# Altium PCB DA1.PcbDoc
Units mil, origin at the board's own origin, x right, y up, seen from the top; angles counter-clockwise.
Board outline 3775.03 x 2530.03 mil, 2 copper layers (Top Layer, Bottom Layer); 64 components, 73 nets, 258 pads, 30 vias.
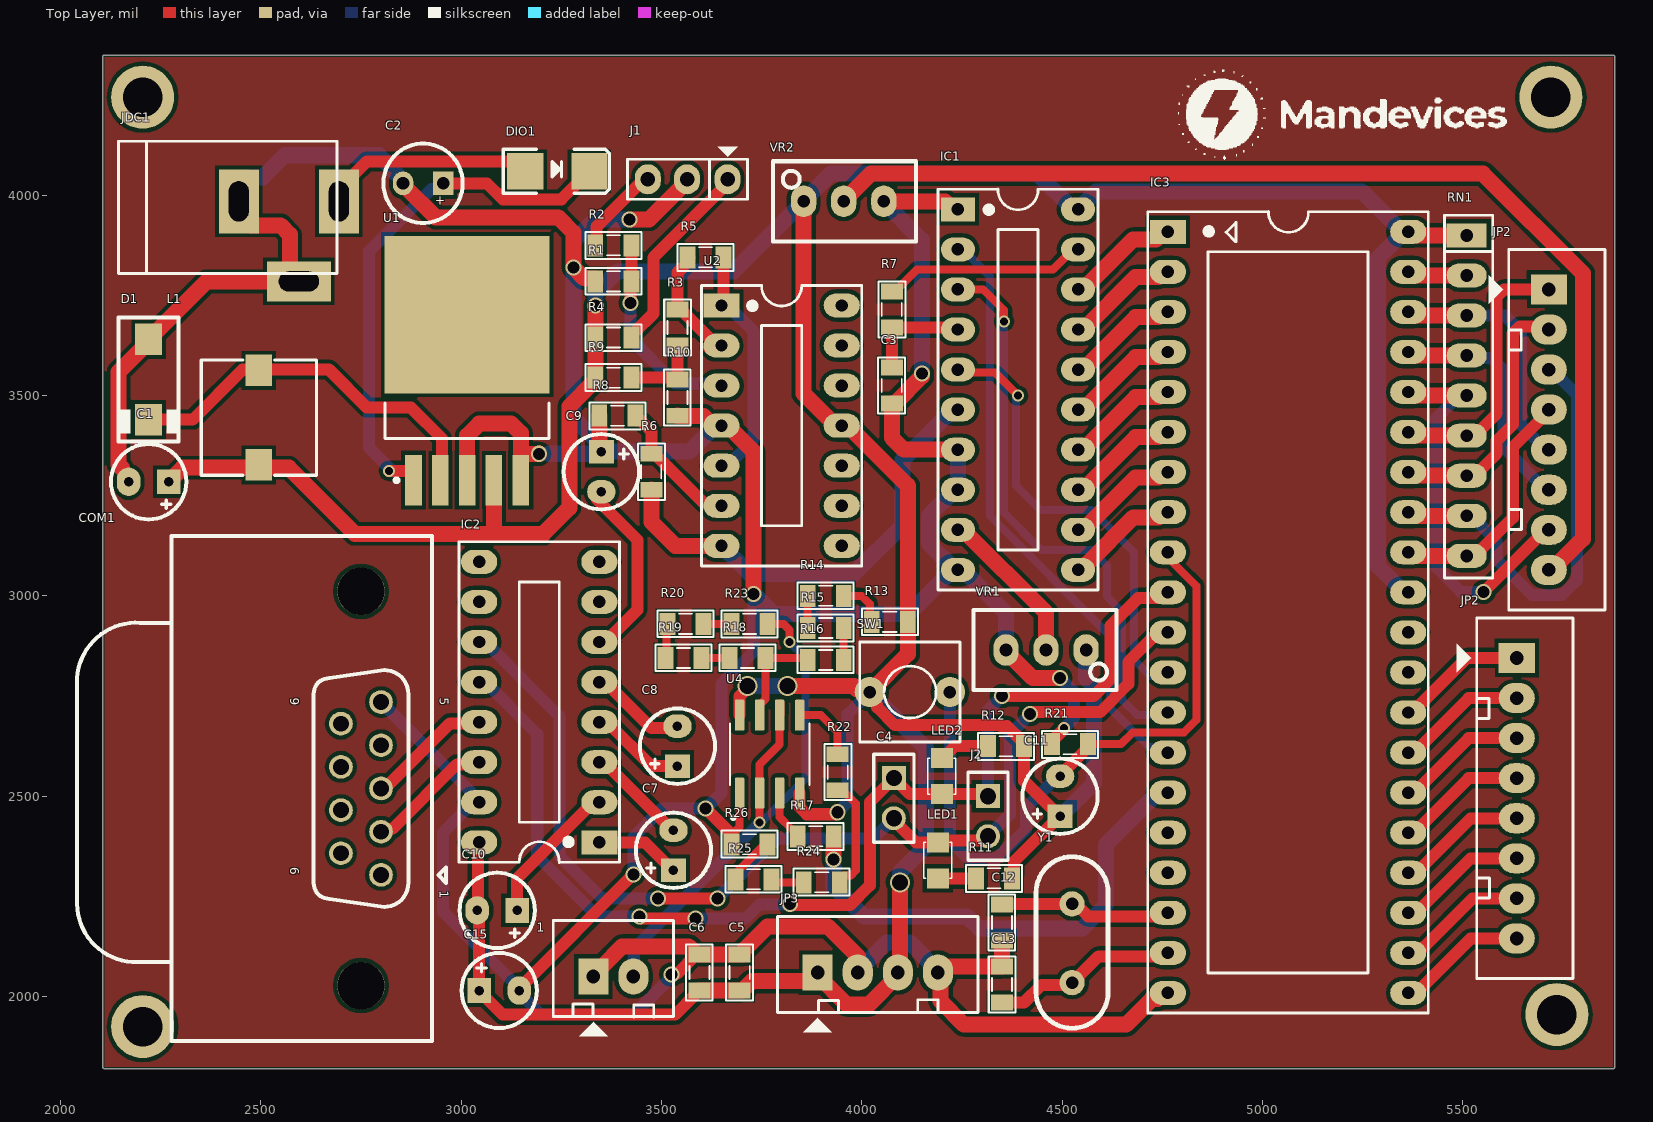
[diagram p0: Top Layer view]
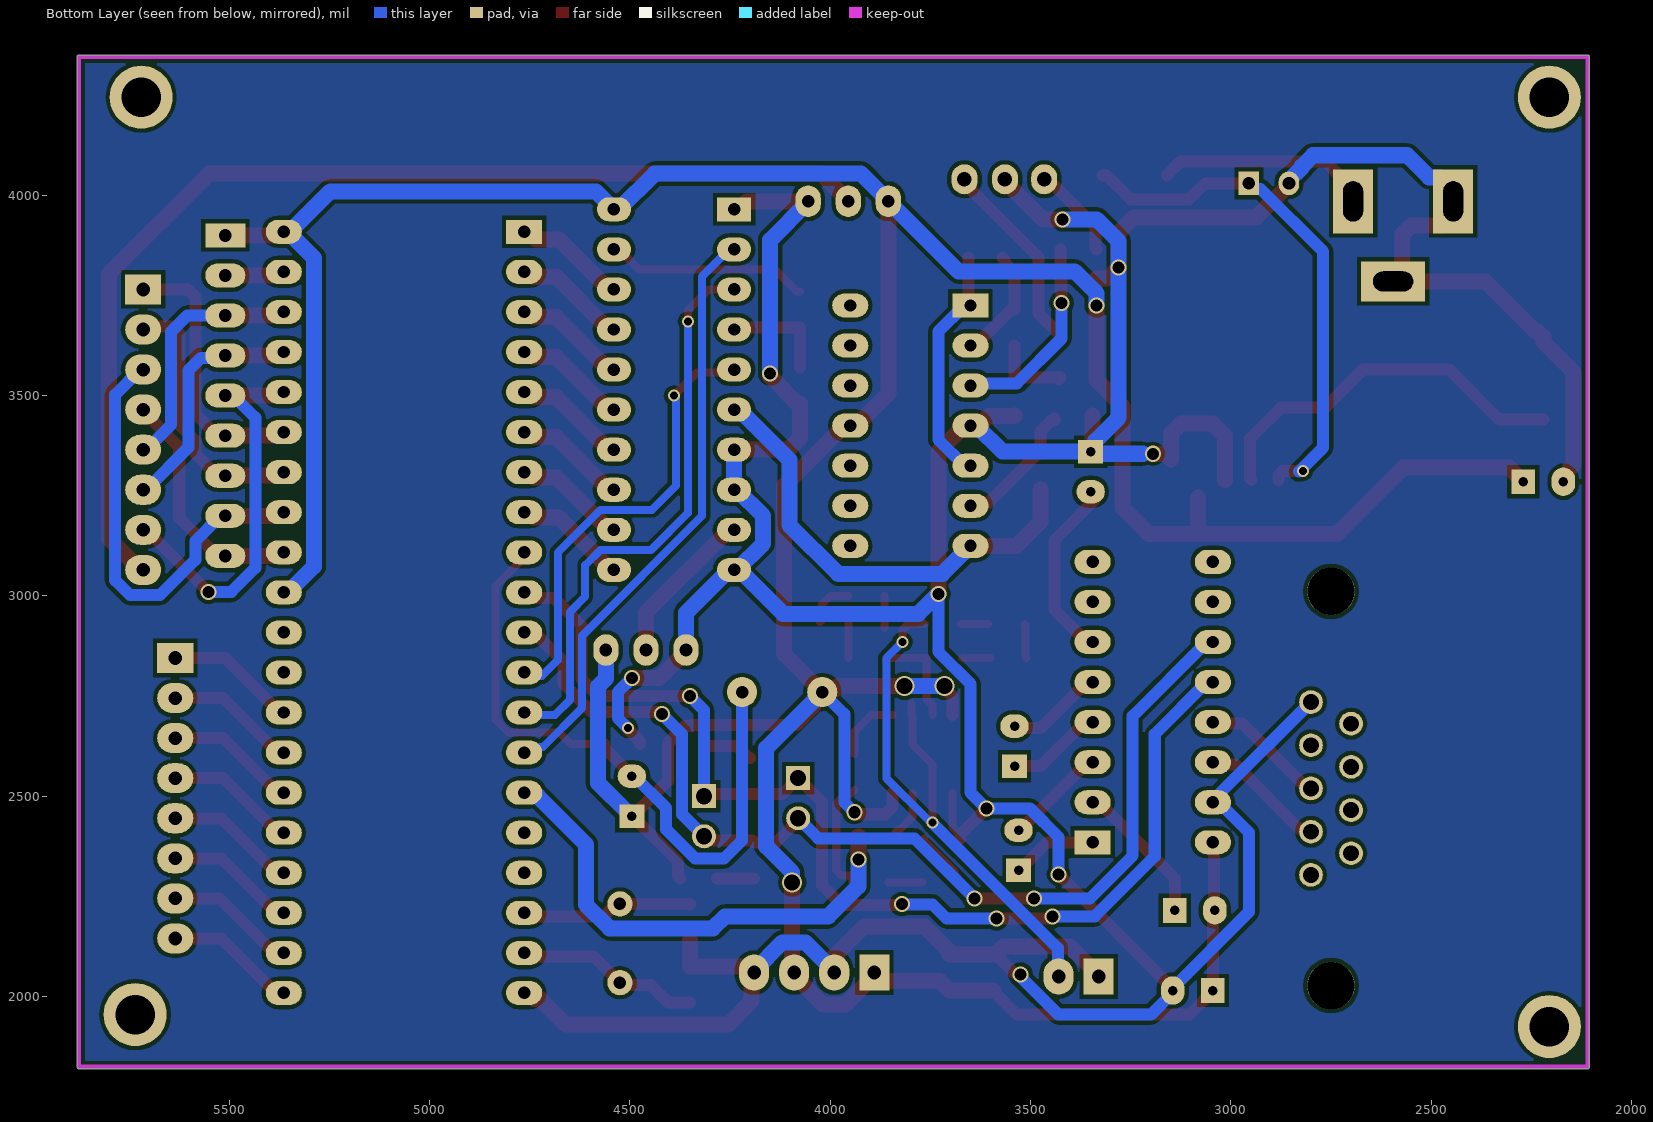
[diagram p1: Bottom Layer view, seen from below]
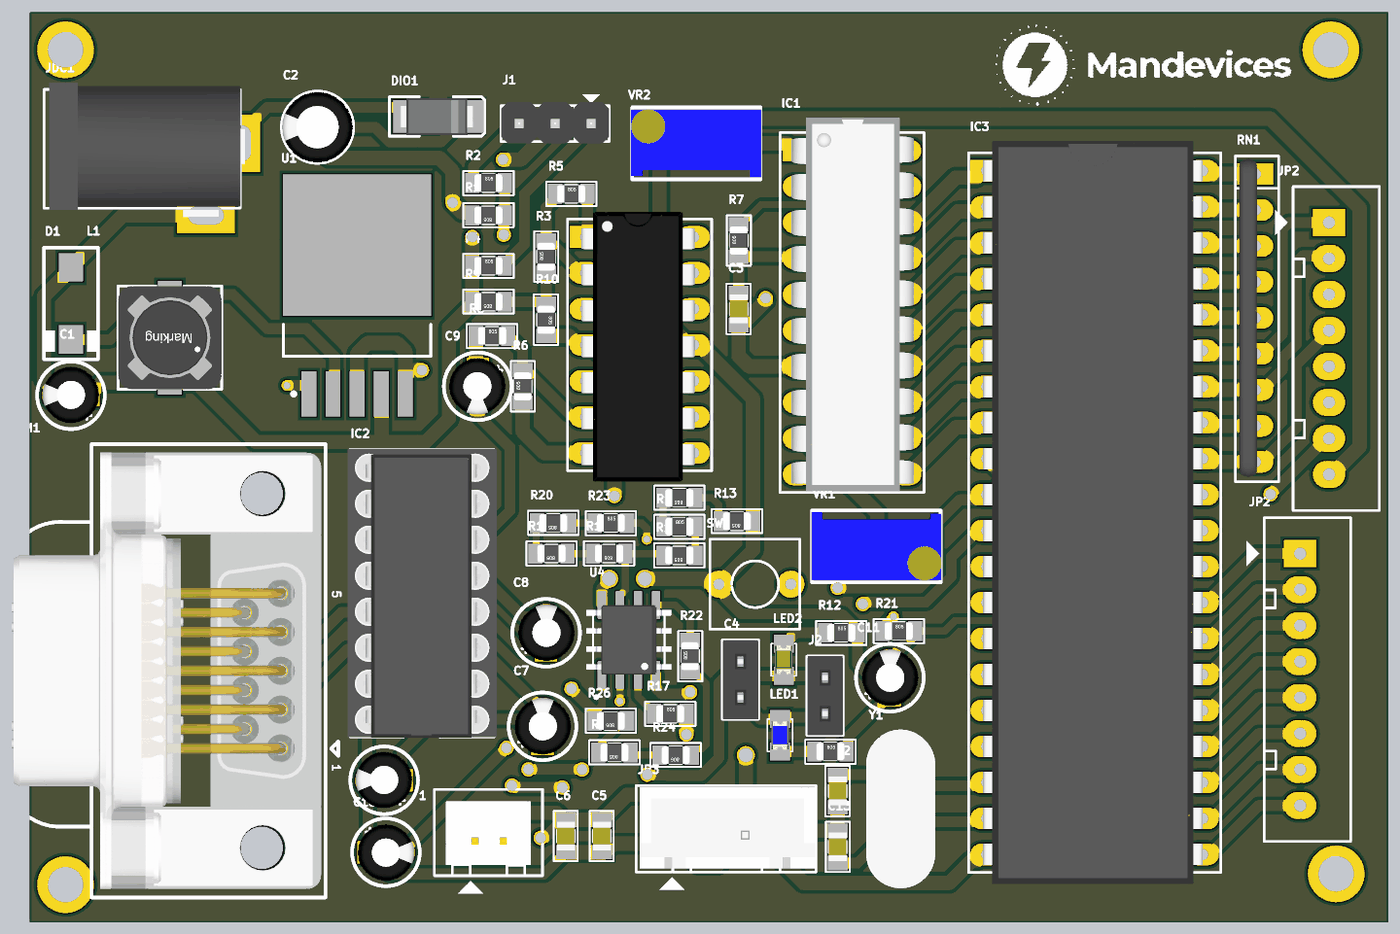
[diagram p2: 3D render of the assembled board from above, using the file's embedded part models]

## Layer stack, top to bottom
Top Solder: solder mask 0.4, Solder Resist, Dk 3.5
Top Layer: signal copper 1.4
Dielectric 1: dielectric 12.6, FR-4, Dk 4.8
Bottom Layer: signal copper 1.4
Bottom Solder: solder mask 0.4, Solder Resist, Dk 3.5

## Board outline
2105.65,1827.5 cw(c2110,1830) 2104.99,1830 2104.99,4345 cw(c2110,4345) 2110,4350.02 5875,4350.02 cw(c5875,4345) 5880.02,4345 cw(c5875,4345) 5879.35,4342.5 cw(c5875,4340) 5880.02,4340 5880.02,1825 cw(c5875,1825) 5875,1819.98 2110,1819.98 cw(c2110,1825)

## Design rules (kind name [scope] priority, off if disabled: settings)
Clearance [All] p1: gap=10 ignorepadtopadclearanceinfootprint=FALSE except(0: Arc-Hole Track-Hole SMDPad-Hole THPad-Hole Via-Hole Fill-Hole Poly-Hole Region-Hole Text-Hole)
PolygonConnect [All] p1: connectstyle=Relief reliefconductorwidth=10 reliefentries=4 polygonreliefangle="90 Angle" airgapwidth=10
RoutingVias [All] p1: holewidth=30 width=40 viastyle="Through Hole" minholewidth=20 minwidth=30 maxholewidth=40 maxwidth=50
SolderMaskExpansion [All] p1: expansion=4 istentingtop=FALSE
Width [All] p1: maxlimit=40 minlimit=20 preferedwidth=30
30 further rules are at their usual default settings.

## Components (designator, comment, footprint, x,y, rotation, side; value= is the part's Value field where it differs from the comment)
1 "HS1101" CON2 3330,2050 r0 top value="Connector 2"
C1 "220uF" C3MM 2220,3285 r180 top
C2 "680uF" C5mm 2905,4030 r180 top
C3 "150pF" CAP_0805 4075,3525 r270 top
C4 "JP2" JP2-C1T 4080,2545 r270 top
C5 "104" CAP_0805 3695,2060 r270 top value=33p
C6 "104" CAP_0805 3595,2060 r270 top value=33p
C7 "10uF/16V" C3MM 3530,2365 r90 top
C8 "10uF/16V" C3MM 3540,2625 r90 top
C9 "10uF/16V" C3MM 3350,3310 r270 top
C10 "10uF/16V" C3MM 3090,2215 r180 top
C11 "10uF" C3MM 4495,2500 r90 top
C12 "33p" CAP_0805 4350,2185 r270 top
C13 "33p" CAP_0805 4350,2030 r90 top
C15 "0.1uF" C3MM 3095,2015 r0 top
COM1 "COM 9 FMALE" COM9B 2750,2519.35 r270 top value="COM 9"
D1 "1N5822" SMA 2220,3540.16 r270 top value="Diode c?m 1N5408"
DIO1 "Diode SMD" DIO-SMD-106 3240,4060 r180 top value=1N5007
IC1 "ADC0804LCN" DIP20/W0.3 4240,3965 r270 top
IC2 "MAX232" DIP16/W0.3 3345,2385 r90 top
IC3 "AT89C52" DIP40/W0.6 4764.04,3908.96 r270 top
J1 "Jumper 3" JP3 3565,4040 r180 top value=J3
J2 "JP2" JP2-C1T 4315,2500 r270 top
JDC1 "Jac DC" DC-IN 2570,3885 r0 top
JP2 "" CON8 5635,2845 r270 top value="Connector 8"
JP2 "JP8" CON8 5715,3765 r270 top value="Connector 8"
JP3 "JP4" CON4 3890,2060 r0 top value="Connector 4"
L1 "33uH" L-SMD-M-7.3x4.5 2495,3445 r0 top value="150 mH"
LED1 "LED" LED-0805-Blue 4190,2295 r90 top value="LED 3 ly Single Colour"
LED2 "LED" LED-0805-Green 4200,2595 r270 top value="LED 3 ly Single Colour"
R1 "50k" RES-SMD-0805 3380,3785 r180 top
R2 "50k" RES-SMD-0805 3380,3875 r0 top
R3 "50k" RES-SMD-0805 3540,3670 r90 top
R4 "100" RES-SMD-0805 3380,3645 r0 top
R5 "50k" RES-SMD-0805 3610,3845 r0 top
R6 "7.5k" RES-SMD-0805 3475,3310 r90 top
R7 "10k" RES-SMD-0805 4075,3715 r90 top
R8 "1k" RES-SMD-0805 3390,3450 r0 top
R9 "100" RES-SMD-0805 3380,3545 r180 top
R10 "100" RES-SMD-0805 3540,3495 r270 top
R11 "390" RES-SMD-0805 4330,2295 r0 top
R12 "390" RES-SMD-0805 4360,2625 r0 top
R13 "24k" RES-SMD-0805 4070,2935 r180 top
R14 "10k" RES-SMD-0805 3910,3000 r180 top
R15 "6.8k" RES-SMD-0805 3910,2920 r0 top
R16 "9.1k" RES-SMD-0805 3910,2840 r180 top
R17 "1k" RES-SMD-0805 3885,2400 r0 top
R18 "270k" RES-SMD-0805 3715,2845 r180 top
R19 "270k" RES-SMD-0805 3555,2845 r180 top
R20 "36k" RES-SMD-0805 3560,2930 r180 top
R21 "10k" RES-SMD-0805 4520,2630 r0 top
R22 "360k" RES-SMD-0805 3940,2560 r90 top
R23 "20k" RES-SMD-0805 3720,2930 r0 top
R24 "360k" RES-SMD-0805 3900,2285 r180 top
R25 "150k" RES-SMD-0805 3729.87,2292.34 r180 top
R26 "39k" RES-SMD-0805 3720,2380 r180 top
RN1 "10K" RN8 5510,3900 r270 top value="Tro thanh 10K"
SW1 "SW" SW2 4220,2760 r180 top value="SW chip 2 pin"
U1 "LM2976" TO-263 3015,3525 r90 top
U2 "LF347" DIP14/W0.3 3650,3725 r270 top
U4 "TLC555IDR" SOIC127P599X175-8N 3770,2605 r90 top
VR1 "10k" VAR_RESISTOR 4460,2865 r180 top value="VR 10K"
VR2 "10K" VAR_RESISTOR 3955,3985 r0 top value="VR 10K"
Y1 "12Mhz" XTAL 4525,2135 r90 top

## Footprints (in the part's own frame and the unit in brackets; to place one, negate y for a bottom-side part, rotate by r counter-clockwise, add the part's x,y. Pads: shape width x height; smd on the part's side, far side on the other; paste and mask are expansions set on the pad)
C3MM [mm]
  rect 1.5x1.58 hole 0.6: 1(-1.27,0)
  oval 1.5x1.8 hole 0.6: 2(1.27,0)
  silkscreen extent -2.39,-2.39 2.39,2.39, body extent -2,-2.03 1.99,1.97, height 7.01
C5mm [mm]
  rect 1.3x1.5 hole 0.8: 1(-1.27,0)
  oval 1.3x1.5 hole 0.8: 2(1.27,0)
  silkscreen extent -2.51,-2.51 2.51,2.51, body extent -2.5,-2.5 2.49,2.5, height 11.01
CAP_0805 [mil]
  rect 39.37x55 smd: 1(-45,0) 2(45,0)
  silkscreen extent -70,-34 70,33, body extent -40,-25 40,25, height 24
COM9B [mm] "D-SUB- 9P, FEMALE, RT ANGLE, TH"
  round 1.5 hole 1 unplated: 1(5.48,1.27) 2(2.74,1.27) 3(0,1.27) 4(-2.74,1.27) 5(-5.48,1.27) 6(4.11,-1.27) 7(1.37,-1.27) 8(-1.37,-1.27) 9(-4.11,-1.27)
  round 3 hole 3 unplated: 10(-12.5,0) 11(12.5,0)
  silkscreen extent -16,-18.01 16,5.4, body extent -15.4,-17.65 15.4,4.2, height 13.2
CON2 [mil] "CON2"
  rect 75x90 hole 34: 1(0,0)
  oval 75x90 hole 34: 2(100,0)
  silkscreen extent -100,-150 200,140, body extent -68,-70 168,107, height 236
CON4 [mil] "CON4"
  rect 75x90 hole 34: 1(0,0)
  oval 75x90 hole 34: 2(100,0) 3(200,0) 4(300,0)
  silkscreen extent -100,-150 400,140, body extent -90,-90 398,136, height 276
CON8 [mil] "CON8"
  rect 75x90 hole 34: 1(0,0)
  oval 75x90 hole 34: 2(100,0) 3(200,0) 4(300,0) 5(400,0) 6(500,0) 7(600,0) 8(700,0)
  silkscreen extent -100,-150 800,140
DC-IN [mil] "Jac DC input"
  rect 100x160 hole 50 slot 100 at 90 deg: 1(125,100) 2(-125,100)
  rect 160x100 hole 50 slot 100 at 0 deg: 3(25,-100)
  silkscreen extent -425,-80 120,250, body extent -410,-105 134,269, height 434
DIO-SMD-106 [mil]
  rect 90x90.55 smd: 1(80,0) 2(-80,0)
  silkscreen extent -130,-55 135,55, body extent -99,-50 106,52, height 95
DIP14/W0.3 [mil] "14PIN, W 300mil, Pin to pin 100mil"
  rect 60x90 hole 31: 1(0,0)
  oval 60x90 hole 31: 2(100,0) 3(200,0) 4(300,0) 5(400,0) 6(500,0) 7(600,0) 8(600,300) 9(500,300) 10(400,300) 11(300,300) 12(200,300) 13(100,300) 14(0,300)
  silkscreen extent -50,-50 650,350, body extent -70,-12 680,302, height 145
DIP16/W0.3 [mil] "16 PIN, W 300mil, Pin to pin 100mil"
  rect 60x90 hole 31: 1(0,0)
  oval 60x90 hole 31: 2(100,0) 3(200,0) 4(300,0) 5(400,0) 6(500,0) 7(600,0) 8(700,0) 9(700,300) 10(600,300) 11(500,300) 12(400,300) 13(300,300) 14(200,300) 15(100,300) 16(0,300)
  silkscreen extent -50,-50 750,350, body extent -52,-57 752,356, height 299
DIP20/W0.3 [mil] "DIP 20, 20 PIN, W 300mil, Pin to pin 100mil"
  rect 60x85 hole 31: 1(0,0)
  oval 60x85 hole 31: 2(100,0) 3(200,0) 4(300,0) 5(400,0) 6(500,0) 7(600,0) 8(700,0) 9(800,0) 10(900,0) 11(900,300) 12(800,300) 13(700,300) 14(600,300) 15(500,300) 16(400,300) 17(300,300) 18(200,300) 19(100,300) 20(0,300)
  silkscreen extent -50,-50 950,350, body extent -91,-18 945,322, height 155
DIP40/W0.6 [mil] "40 PIN, W 600mil, Pin to pin 100mil"
  rect 60x90 hole 31: 1(0,0)
  oval 60x90 hole 31: 2(100,0) 3(200,0) 4(300,0) 5(400,0) 6(500,0) 7(600,0) 8(700,0) 9(800,0) 10(900,0) 11(1000,0) 12(1100,0) 13(1200,0) 14(1300,0) 15(1400,0) 16(1500,0) 17(1600,0) 18(1700,0) 19(1800,0) 20(1900,0) 21(1900,600) 22(1800,600) 23(1700,600) 24(1600,600) 25(1500,600) 26(1400,600) 27(1300,600) 28(1200,600) 29(1100,600) 30(1000,600) 31(900,600) 32(800,600) 33(700,600) 34(600,600) 35(500,600) 36(400,600) 37(300,600) 38(200,600) 39(100,600) 40(0,600)
  silkscreen extent -50,-50 1950,650, body extent -82,-10 1982,600, height 224
JP2-C1T [mm] "2 row, straight, gold plating"
  rect 1.52x1.52 hole 1.02: 1(0,0)
  round 1.52 hole 1.02: 2(2.54,0)
  silkscreen extent -1.52,-1.27 4.06,1.27, body extent -1.52,-1.25 4.06,1.25, height 8.51
JP3 [mil] "Jumper 3"
  oval 65x75 hole 36: 1(-100,0) 2(1,0) 3(99,0)
  silkscreen extent -150,-81 150,50, body extent -150,-60 150,55, height 355
L-SMD-M-7.3x4.5 [mm] "WE-PDA SMD Shielded Power Inductor, 7345"
  rect 1.7x2 smd: 1(0,3) 2(0,-3)
  silkscreen extent -3.65,-3.65 3.65,3.65, body extent -3.65,-3.65 3.65,3.65, height 4.05
LED-0805-Blue [mil]
  rect 50x55 smd: 1(0,0) 2(90,0)
  silkscreen extent 0,-35 90,35, body extent 5,-25 85,25, height 43
LED-0805-Green [mil]
  rect 50x55 smd: 1(0,0) 2(90,0)
  silkscreen extent 0,-35 90,35, body extent 5,-25 85,25, height 43
RES-SMD-0805 [mil]
  rect 39.37x55 smd: 1(-45,0) 2(45,0)
  silkscreen extent -70,-34 70,33, body extent -39,-25 39,25, height 31
RN8 [mil] "R SIP8, 9 Pin"
  rect 60x100 hole 32: 1(0,0)
  oval 60x100 hole 32: 2(100,0) 3(200,0) 4(300,0) 5(400,0) 6(500,0) 7(600,0) 8(700,0) 9(800,0)
  silkscreen extent -50,-55 855,65, body extent -43,-44 843,5, height 259
SMA [mm]
  rect 2x1.7 smd: 1(-2.544,0) 2(2.544,0)
  silkscreen extent -3.94,-1.9 3.94,1.91, body extent -2.87,-1.4 2.87,1.4, height 2.29
SOIC127P599X175-8N [mm]
  rrect25% 1.97x0.6 smd: 1(-2.47,1.905) 2(-2.47,0.635) 3(-2.47,-0.635) 4(-2.47,-1.905) 5(2.47,-1.905) 6(2.47,-0.635) 7(2.47,0.635) 8(2.47,1.905)
  silkscreen extent -4.14,-2.52 1.95,2.52, body extent -2.45,-3 2.45,3, height 1.75
SW2 [mil] "SW button 2pin, 250x 250 mil"
  round 75 hole 31: 1(0,0) 2(200,0)
  silkscreen extent -25,-125 225,125
TO-263 [mm]
  rect 3.2x1.05 smd: 1(-6,3.4) 2(-6,1.7) 3(-6,0) 4(-6,-1.7) 5(-6,-3.4)
  rect 10x10.45 smd: 6(4.5,0)
  silkscreen extent -6.12,-5.2 -1.1,5.2, body extent -6.58,-5.2 7.57,5.2, height 4.65
VAR_RESISTOR [mm]
  oval 1.6x2 hole 0.8: 1(-2.54,0) 2(0,0) 3(2.54,0)
  silkscreen extent -4.47,-2.54 4.6,2.54, body extent -4.54,-2.4 4.66,2.4, height 12.02
XTAL [mm]
  round 1.6 hole 0.8: 1(-2.552,0.001) 2(2.448,0.001)
  silkscreen extent -5.44,-2.29 5.44,2.29, body extent -5.55,-2.32 5.62,2.35, height 3.63

## Part data
1: library part Con2, "Connector 2"
C1 C2 C7 C8 C9 C10 C11 C15: library part "Cap Pol", "Polarized Capacitor (Axial)", LatestRevisionDate=17-Jul-2002, LatestRevisionNote="Re-released for DXP Platform.", PackageReference=POLAR0.8, Published=8-Jun-2000, Publisher="Altium Limited"
C3: library part "Tu 0805 220nF 50V 10%", "Dán", Chung_Loai=Dán, Don_Vi=Con, Ma_Hang=MH008099, So_Chan=2, Ten_Linh_Kien="Tụ 0805 220nF 50V 10%"
C4 J2: "WR-PHD 2.54 mm Angled Socket Header", Manufacturer="W¨¹rth Elektronik eiSos GmbH", partNo=613002143121, ComponentLink1 Description=Manufacturer, ComponentLink1URL=http://www.we-online.com, ComponentLink2 Description=Datasheet, ComponentLink2URL=http://katalog.we-online.de/em/datasheet/6130xx143121.pdf, Created by="Karrer Zheng", Created Date="29 March 2013", NoPins=02
C5 C6 C12 C13: library part CapSMD, "Capacitor", LatestRevisionDate=17-Jul-2002, LatestRevisionNote="Re-released for DXP Platform.", PackageReference=RAD-0.3, Published=8-Jun-2000, Publisher="Altium Limited"
COM1: library part COM9F, "COM 9", PackageDocument=O, DatasheetDocument=1-Sep-1999, Gender=Receptacle, LatestRevisionDate=17-Jul-2002, LatestRevisionNote="Re-released for DXP Platform.", Orientation="Right Angle", PackageReference=788750, Positions=9, Published=15-Jun-2001, Publisher="Altium Limited"
D1: "Schottky Rectifiers"
DIO1: "Default Diode", Code - JEDEC=DO-214-AB, Published=8-Jun-2000, Publisher="Altium Limited", Revision="July-2002: Re-released for DXP Platform."
IC1: library part ADC0804, "Cắm", Chung_Loai=Cắm, Don_Vi=Con, Ma_Hang=MH002626, Ten_Linh_Kien="ADC0804LCN DIP20"
IC2: "Dual EIA-232 Driver/Receiver"
IC3: "Atmel AT89C52, 8k Byte Flash Memory , 40 Pin"
J1: library part JP3
JDC1: library part DCIN, "Jac DC input"
JP2 JP2: library part Con8, "Connector 8"
JP3: library part Con4, "Connector 4"
L1: library part Inductor, "Inductor"
LED1 LED2: "LED Single colour Green and Red"
R1 R2 R3 R4 R5 R6 R8 R9 R10: library part "Tro 0805 5% 82k", "Dán", Chung_Loai=Dán, Don_Vi=Con, Ma_Hang=MH005329, So_Chan=2, Ten_Linh_Kien="Trở 0805 5% 82k"
R7: library part "Tro 0805 5% 10k", "Dán", Chung_Loai=Dán, Don_Vi=Con, Ma_Hang=MH005239, So_Chan=2, Ten_Linh_Kien="Trở 0805 5% 10k"
R11 R12: library part "Resistor - SMD", "Resistor", Manufacturer="Generic Components", Class=Passive, Published=08/06/2000, Publisher="Altium Hobart Technology Centre"
R13 R14 R15 R16 R18 R19 R21 R23 R24 R25 R26: library part "Resistor - SMD", "Resistor SMD", Manufacturer="Generic Components", Class=Passive, Published=08/06/2000, Publisher="Altium Hobart Technology Centre"
R17: library part "Tro 0805 1% 1k", "Dán", Chung_Loai=Dán, Don_Vi=Con, Ma_Hang=MH005468, So_Chan=2, Ten_Linh_Kien="Trở 0805 1% 1k"
R20: library part "Tro 0805 5% 510k", "Dán", Chung_Loai=Dán, Don_Vi=Con, Ma_Hang=MH007566, So_Chan=2, Ten_Linh_Kien="Trở 0805 5% 510k"
R22: library part "Tro 0805 5% 1M", "Dán", Chung_Loai=Dán, Don_Vi=Con, Ma_Hang=MH005235, So_Chan=2, Ten_Linh_Kien="Trở 0805 5% 1M"
RN1: library part RN8, "Resistor 8 (Thanh)"
SW1: library part SW2, "Switch button 2 pin"
U1: library part LM2596, Max Input Voltage="12 V", Max Output Current="3 (6.0 peak) A", Max Output Voltage=mV, Temperature Range="-40 to +125 degC", Category=IC-Power, Min Input Voltage=mV, Min Output Voltage=mV, Mounting Technology="Surface Mount", Status=Unreleased, Supply Voltage=mV
U2: "Low Power Quad Operational Amplifier", Current - Input Bias=50pA, Current - Output / Channel=-, Current - Supply=8mA, Manufacturer="Texas Instruments", Manufacturer Part Number=LF347BD, Operating Temperature="0°C ~ 70°C", Package / Case="14-SOIC (3.9mm Width), 14-SOL", Supplier Part Number=296-7136-5-ND, Voltage - Input Offset=3000µV, Voltage - Supply, Single/Dual (±)="7 V ~ 36 V, ±3.5 V ~ 18 V", Amplifier Type=J-FET, Category="Integrated Circuits (ICs)", Gain Bandwidth Product=3MHz, Number of Circuits=4, Output Type=-, Packaging=Tube, RoHS="RoHS Compliant", Slew Rate="13 V/µs", Supplier=Digi-Key, Supplier 1=Digi-Key, Supplier Part Number 1=296-7136-5-ND, Text Field1=pristel=Nsc\nsanopea\<parttype>.ckt
U4: "2.1-MHz, 250-A, Low-Power Timer 8-SOIC -40 to 85", Package="SOIC-8 Texas Instruments", Availability=Good, MF="Texas Instruments", MP=TLC555IDR, Price=None, Purchase-URL=https://pricing.snapeda.com/search/part/TLC555IDR/?ref=eda, SnapEDA_Link=https://www.snapeda.com/parts/TLC555IDR/Texas%20Instruments/view-part/46238/?ref=snap
VR1 VR2: library part VR, "Var Resistor"
Y1: library part XTAL, "Crystal Oscillator", LatestRevisionDate=17-Jul-2002, LatestRevisionNote="Re-released for DXP Platform.", PackageReference=R38, Published=8-Jun-2000, Publisher="Altium Limited"

## Free pads (board coordinates)
  round 157.48 hole 98.42: 1(2205,1925) 1(2205,4245) 1(5720,4245) 1(5735,1955)

## Via types
v1: diameter 40, hole 30, Top Layer to Bottom Layer, 21 vias
v2: diameter 30, hole 20, Top Layer to Bottom Layer, 6 vias
v3: diameter 50, hole 40, Top Layer to Bottom Layer, 3 vias

## Nets (pads, with @x,y where several pads share a name; then routed paths per layer and width w, separated by ;. In a path a pad name is that pad's centre, name@x,y a point inside that pad or via, vN(x,y) a via of type N, cw(c..) or ccw(c..) an arc to the next point about the centre after c; other vN are vias at no path point)
ADC0: IC1.18 IC3.1 | length 260.9
  Top Layer w40: IC1.18 4552.5,3765 4677.5,3890 4735,3890 IC3.1@4745,3900
ADC1: IC1.17 IC3.2 | length 260.9
  Top Layer w40: IC1.17 4552.5,3665 4683.67,3796.17 4741.17,3796.17 IC3.2@4745,3800
ADC2: IC1.16 IC3.3 | length 260.9
  Top Layer w40: IC1.16 4552.5,3565 4683.67,3696.17 4741.17,3696.17 IC3.3@4745,3700
ADC3: IC1.15 IC3.4 | length 260.9
  Top Layer w40: IC1.15 4552.5,3465 4683.67,3596.17 4741.17,3596.17 IC3.4@4745,3600
ADC4: IC1.14 IC3.5 | length 260.9
  Top Layer w40: IC1.14 4552.5,3365 4683.67,3496.17 4741.17,3496.17 IC3.5@4745,3500
ADC5: IC1.13 IC3.6 | length 260.9
  Top Layer w40: IC1.13 4552.5,3265 4683.67,3396.17 4741.17,3396.17 IC3.6@4745,3400
ADC6: IC1.12 IC3.7 | length 260.9
  Top Layer w40: IC1.12 4552.5,3165 4683.67,3296.17 4741.17,3296.17 IC3.7@4745,3300
ADC7: IC1.11 IC3.8 | length 260.9
  Top Layer w40: IC1.11 4547.09,3065 4562.5,3080.41 4678.26,3196.17 4741.17,3196.17 IC3.8@4745,3200
ENABLE: IC3.36 JP2.7@5715,3165 RN1.5 | length 1006.8
  Top Layer w30: v1(5552.5,3010) 5707.5,3165 JP2.7@5715,3165
  Top Layer w40: IC3.36@5345,3500 RN1.5
  Bottom Layer w30: RN1.5 5490,3500 5435,3445 5435,3070 5495,3010 v1(5552.5,3010)
GND: 1.1 C1.2 C2.2 C3.2 C5.1 C6.1 C9.1 C12.2 C13.2 C15.2 COM1.5 D1.1 IC1.1 IC1.7 IC1.8 IC1.10 IC2.15 IC3.20 J1.2 JDC1.2 JDC1.3 JP3.2 JP3.4 R1.2 R8.1 R10.2 R21.1 R26.2 U1.3 U1.5 U2.4 U4.1 VR1.3 VR2.3 | length 12293.4
  Top Layer w20: R26.2@3675,2402.81 3695,2422.81 U4.1
  Top Layer w30: C15.2 3145,2020 v1(3430,2305) ; v1(3525,2055) 3526.91,2056.91 3539.1,2056.91 3587.19,2105 3587.81,2105 C6.1 ; v1(3610.47,2469.53) 3675,2405 3675,2402.81 R26.2@3675,2395 ; R21.1 4475,2637.81 4505,2667.82 v2(4505,2670)
  Top Layer w40: 2153.34,3318.87 2145,3327.21 2145,3559.41 2220,3634.41 D1.1 2220,3646.22 2233.46,3659.68 2239.37,3659.68 2364.69,3785 JDC1.3 ; JDC1.2 2445,3955 2475,3925 2549.14,3925 2572.57,3901.57 JDC1.3@2572.57,3790 ; C2.2 2858.65,4026.35 2858.65,4022.41 2936.34,3944.72 3242.43,3944.72 3280,3907.15 v1(3280,3820) 3306.64,3793.36 3311.57,3793.36 3312.43,3792.5 3334.69,3792.5 3335,3792.19 R1.2 ; U1.3 3015,3400 3045,3430 3125,3430 3148.86,3406.14 ; v1(3194.85,3354.85) 3194.69,3354.69 3163.55,3354.69 3148.86,3340 3148.86,3406.14 ; 1.1 3330,2057.5 3347.5,2075 3352.04,2075 3402.04,2125 3567.82,2125 C6.1@3587.81,2105 ; R8.1 3345,3365 C9.1 ; v1(3420,3940) 3469,3940 3564,4035 J1.2 ; R10.2 3540.31,3449.69 3604.9,3449.69 3629.59,3425 U2.4 3665,3425 3730,3360 v1(3730,3005) ; C6.1 3610,2105 C5.1 3702.19,2105 3702.5,2105.31 3702.5,2112.5 3765,2175 3915,2175 3990,2100 JP3.2 ; VR2.3 4207.5,3985 4227.5,3965 IC1.1 ; v1(4150,3555) 4150,3547.81 4082.19,3480 C3.2 4075,3395 4105,3365 IC1.7 ; JP3.4@4190,2075 JP3.4 4196.7,2053.3 4196.7,1988.3 4255,1930 4660,1930 4723.47,1993.47 4738.47,1993.47 IC3.20@4745,2000 ; JP3.4@4206.97,2075 C13.2 C12.2 ; VR1.3 4360,2862.27 4427.27,2795 v1(4495,2795) ; 3148.86,3406.14 3148.86,3354.69 3148.86,3406.14
  Bottom Layer w30: COM1.5 3024.26,2510.84 3024.26,2498.86 IC2.15@3038.12,2485 ; IC2.15 IC2.15@3038.12,2485 ; v1(3430,2305) 3430,2398.02 3501.51,2469.53 v1(3610.47,2469.53) 3650,2509.06 3650,2780.71 3730,2860.71 v1(3730,3005) ; v1(3525,2055) 3525,2049.11 3430.89,1955 3199.09,1955 3145,2009.09 C15.2 3145,2020.91 2955,2210.91 2955,2410 3030,2485 IC2.15@3038.12,2485 ; v1(4495,2795) 4530,2760 4530,2695 v2(4505,2670)
  Bottom Layer w40: JDC1.2 2445,4015 2475,4045 2505,4045 2560,4100 2795,4100 2823.28,4071.72 2823.28,4068.68 2855,4036.96 C2.2 ; 3219.85,3354.85 3344.85,3354.85 C9.1 3570,3360 3635,3425 U2.4 ; C9.1@3338.9,3386.1 3280,3445 3280,3885 3335,3940 v1(3420,3940) ; v1(3730,3005) 3780,2955 4117.5,2955 4227.5,3065 IC1.10@4232.91,3065 ; JP3.2 3990,2062.96 4062.04,2135 4119.61,2135 4190,2064.61 JP3.4 ; VR2.3 4055,3983.35 4150,3888.35 v1(4150,3555) ; IC1.7 IC1.8 4232.91,3265 4167.5,3199.59 4167.5,3130.41 IC1.10@4232.91,3065 ; VR1.3 4360,2957.5 4252.5,3065 IC1.10 IC1.10@4232.91,3065
HS1101_COUNTER: IC3.15 R17.2 | length 1208.5
  Top Layer w40: v1(3930,2342.5) R17.2
  Bottom Layer w40: v1(3930,2342.5) 3930,2275 4005,2200 4262.67,2200 4292.78,2169.89 4550.44,2169.89 4610,2229.45 4610,2380 4730,2500 IC3.15@4745,2500
INTR_ADC: IC1.5 IC3.12 | length 1117.9
  Top Layer w20: IC1.5 4247.5,3557.5 4332.5,3557.5 v2(4390,3500)
  Bottom Layer w20: v2(4390,3500) 4385,3495 4385,3275 4445,3215 4573.21,3215 4680,3108.21 4680,2840 4720,2800 IC3.12@4745,2800
Net1_2: 1.2 R23.2 U4.2 U4.6 | length 1430.9
  Top Layer w20: v2@3745,2445 U4.2 3745,2579.09 3795,2629.09 U4.6 3796.81,2704.06 U4.6@3796.81,2731.02 ; R23.2 3805,2930 3820,2915 v2(3820,2885)
  Bottom Layer w20: v2(3745,2435) 3747.71,2435 3752.71,2440 3755,2440 3859.49,2544.49 3859.49,2845.51 v2(3820,2885)
  Bottom Layer w30: 1.2 3432.09,2052.09 3432.09,2120.73 3745,2433.64 v2(3745,2435)
NetC2_1: C2.1 DIO1.2 U1.1 | length 1317.5
  Top Layer w30: v2(2820,3312.17) 2870.47,3312.17 2881.14,3301.5 U1.1 ; C2.1 3064.37,4030 3104.64,3989.72 3250,3989.72 3310.28,4050 DIO1.2@3320,4050
  Bottom Layer w30: v2@2830,3310 2770,3370 2770,3860 2925.47,4015.47 2944.41,4015.47 2955,4026.06 C2.1
NetC3_1: C3.1 IC1.4 R7.1 | length 267.1
  Top Layer w30: C3.1 R7.1 4235,3670 IC1.4
NetC7_1: C7.1 IC2.1 | length 214
  Top Layer w30: IC2.1 3458.43,2385 3528.43,2315 C7.1
NetC7_2: C7.2 IC2.3 | length 255.4
  Top Layer w30: IC2.3 3357.05,2585 3527.05,2415 C7.2
NetC8_1: C8.1 IC2.4 | length 240.6
  Top Layer w30: IC2.4 3365,2685 3475,2575 C8.1
NetC8_2: C8.2 IC2.5 | length 244.7
  Top Layer w30: IC2.5 3360,2785 3475,2670 3535,2670 C8.2
NetC9_2: C9.2 IC2.6 | length 446.1
  Top Layer w30: C9.2@3338.92,3241.08 3440,3140 3440,2965 3360,2885 IC2.6
NetC10_1: C10.1 IC2.2 | length 363.7
  Top Layer w30: C10.1 3140,2295 3330,2485 IC2.2
NetCOM1_2: COM1.2 IC2.14 | length 284.7
  Top Layer w30: 2829.01,2419.01 2989.47,2579.47 3039.47,2579.47 IC2.14
NetCOM1_3: COM1.3 IC2.13 | length 287.8
  Top Layer w30: COM1.3@2821.02,2531.02 2972.13,2682.13 IC2.13@3042.13,2682.13
  Top Layer w40: IC2.13@3042.13,2682.13 IC2.13
NetD1_2: D1.2 L1.1 U1.2 | length 961.4
  Top Layer w30: D1.2 2329.84,3440 2454.84,3565 2495,3565 2540,3565 2575,3565 2670,3565 2765,3470 2875,3470 2952.6,3392.4 2952.6,3293.31 U1.2
NetDIO1_1: DIO1.1 JDC1.1 | length 538.3
  Top Layer w30: JDC1.1 2695,4015 2764.53,4084.53 3125.75,4084.53 3160,4050.28 DIO1.1@3160,4050
NetIC1_19: IC1.19 R7.2 | length 508.5
  Top Layer w20: R7.2 4082.81,3760 4137.82,3815 4477.5,3815 4527.5,3865 IC1.19
NetIC3_39: IC3.39 RN1.2 | length 165
  Top Layer w40: IC3.39@5345,3800 RN1.2
NetJ1_1: J1.1 R4.2 | length 496.1
  Top Layer w30: R4.2 3425,3652.81 3429.68,3657.5 3432.5,3657.5 3480,3705 3480,3845 3665,4030 J1.1
NetJ1_3: J1.3 R2.1 | length 234.9
  Top Layer w30: R2.1@3335,3865 3338.41,3868.41 3338.41,3922.05 3456.36,4040 J1.3
NetLED1_1: LED1.1 R11.1 | length 92.7
  Top Layer w30: LED1.1 4190.16,2294.84 R11.1@4282.66,2294.84
NetLED2_1: LED2.1 R12.1 | length 127.4
  Top Layer w30: LED2.1 4202.5,2595 4232.5,2625 R12.1
NetR1_1: R1.1 R2.2 U2.3 | length 499.6
  Top Layer w30: v1(3422.6,3731.23) 3422.6,3782.59 R1.1 ; R1.1@3425,3765 R2.2@3425,3865
  Bottom Layer w30: 3422.59,3711.23 3422.59,3642.41 3534.26,3530.74 3644.26,3530.74 U2.3
NetR3_1: R3.1 R9.1 R10.1 | length 208.7
  Top Layer w30: R9.1@3429.69,3540.31 R9.1 3489.69,3545 3490,3544.69 3535.31,3544.69 R10.1 R3.1
NetR3_2: R3.2 R5.1 U2.2 | length 322.8
  Top Layer w30: R5.1@3570,3845 3565.31,3840.31 3565.31,3832.5 3540,3807.19 R3.2 3547.81,3715 3637.81,3625 U2.2 3644.26,3619.26 U2.2@3619.26,3619.26
NetR5_2: R5.2 U2.1 U2.5 | length 605.9
  Top Layer w30: U2.1 3655,3730 R5.2
  Bottom Layer w30: U2.5 3665,3325 3730,3390 3730,3660 3665,3725 U2.1
NetR6_2: R6.2 R8.2 U2.6 | length 336.7
  Top Layer w30: R8.2@3439.68,3443.05 3439.68,3437.5 3448.56,3437.5 3475,3411.06 R6.2 3482.81,3355 3607.07,3230.74 3644.26,3230.74 U2.6
NetR13_2: R13.2 R14.1 | length 120.4
  Top Layer w20: R14.1 4000,3000 4020,2980 4020,2940 R13.2
NetR14_2: R14.2 R15.1 | length 80
  Top Layer w20: R15.1 R14.2
NetR15_2: R15.2 R16.1 | length 85
  Top Layer w20: R16.1@3955,2845 R15.2@3955,2930
NetR16_2: R16.2 R18.1 U4.7 | length 259.7
  Top Layer w20: U4.7 3745,2729.21 3746.81,2731.02 3748.28,2731.02 3760,2742.74 R18.1 3855.32,2845 3860.32,2840 R16.2@3860.32,2832.5
NetR17_1: R17.1 U4.3 | length 119.9
  Top Layer w20: U4.3 3795,2447.81 3825.31,2417.5 3830.31,2417.5 3835.31,2412.5 R17.1@3835.31,2407.5
NetR18_2: R18.2 R19.1 | length 70
  Top Layer w20: R19.1 R18.2
NetR19_2: R19.2 R20.2 | length 87.1
  Top Layer w20: R19.2 3512.5,2847.5 3512.5,2927.5 R20.2
NetR20_1: R20.1 R23.1 | length 70
  Top Layer w20: R20.1 R23.1
NetR22_1: R22.1 R24.1 | length 282.9
  Top Layer w20: R22.1 3949.69,2505.31 3961.26,2505.31 3985,2481.57 3985,2314.22 3973.28,2302.5 3954.69,2302.5 3945,2292.81 R24.1
NetR22_2: R22.2 U4.5 | length 167.8
  Top Layer w20: U4.5 3898.28,2702.24 3940,2660.53 R22.2
NetR24_2: R24.2 R25.1 | length 85
  Top Layer w20: R25.1@3770,2285 R24.2
NetR25_2: R25.2 R26.1 | length 160.2
  Top Layer w20: R25.2@3680,2285 3689.69,2294.69 3689.69,2311.87 3756.37,2378.55 3765,2387.19 R26.1@3765,2395 ; R25.2 R25.2@3684.87,2300.16 ; R26.1@3759.96,2374.96 R26.1
P0_4: IC3.35 JP2.1@5715,3765 RN1.6 | length 692.5
  Top Layer w30: RN1.6 5530,3400 5585,3455 5585,3747.43 5602.57,3765 JP2.1@5715,3765
  Top Layer w40: IC3.35@5345,3400 RN1.6
P0_5: IC3.34 JP2.2@5715,3665 RN1.7 | length 679.8
  Top Layer w30: RN1.7 5530,3300 5585,3355 5585,3387.46 5625,3427.46 5625,3655 5642.57,3672.57 5707.43,3672.57 JP2.2@5715,3665
  Top Layer w40: IC3.34@5345,3300 RN1.7
P0_6: IC3.33 JP2.3@5715,3565 RN1.8 | length 1123.7
  Top Layer w40: IC3.33@5345,3200 RN1.8
  Bottom Layer w30: RN1.8 5521.88,3200 5585,3136.88 5585,3090 5672.5,3002.5 5748.39,3002.5 5785,3039.11 5785,3502.5 5722.5,3565 JP2.3@5715,3565
P0_7: IC3.32 JP2.4@5715,3465 RN1.9 | length 626.6
  Top Layer w30: RN1.9 5530,3100 5625,3195 5625,3370.89 5715,3460.89 JP2.4@5715,3465
  Top Layer w40: IC3.32@5345,3100 RN1.9
P2_0: IC3.21 JP2.8@5635,2145 | length 327.3
  Top Layer w30: IC3.21 5383.96,2008.96 5520,2145 JP2.8@5635,2145
P2_1: IC3.22 JP2.7@5635,2245 | length 327.3
  Top Layer w30: IC3.22 5387.15,2108.96 5402.15,2123.96 5403.96,2123.96 5525,2245 JP2.7@5635,2245
P2_2: IC3.23 JP2.6@5635,2345 | length 327.3
  Top Layer w30: IC3.23 5383.96,2208.96 5520,2345 JP2.6@5635,2345
P2_3: IC3.24 JP2.5@5635,2445 | length 327.3
  Top Layer w30: IC3.24 5383.96,2308.96 5520,2445 JP2.5@5635,2445
P2_4: IC3.25 JP2.4@5635,2545 | length 327.3
  Top Layer w30: IC3.25 5378.96,2408.96 5515,2545 JP2.4@5635,2545
P2_5: IC3.26 JP2.3@5635,2645 | length 327.3
  Top Layer w30: IC3.26 5378.96,2508.96 5515,2645 JP2.3@5635,2645
P2_6: IC3.27 JP2.2@5635,2745 | length 327.3
  Top Layer w30: IC3.27 5378.96,2608.96 5515,2745 JP2.2@5635,2745
P2_7: IC3.28 JP2.1@5635,2845 | length 327.3
  Top Layer w30: IC3.28 5373.96,2708.96 5510,2845 JP2.1@5635,2845
RD_ADC: IC1.2 IC3.14 | length 1483.5
  Bottom Layer w20: IC1.2 4252.5,3865 4320,3797.5 4320,3200 4620,2900 4620,2720 4717.61,2622.39 4724.78,2622.39 IC3.14@4745,2602.17
RS_LCD: IC3.38 JP2.5@5715,3365 RN1.3 | length 645
  Top Layer w40: IC3.38@5345,3700 RN1.3
  Bottom Layer w30: RN1.3 5605,3700 5645,3660 5645,3427.5 5707.5,3365 JP2.5@5715,3365
RST: C11.2 IC3.9 R21.2 SW1.1 | length 1624.8
  Top Layer w20: R21.2 4647.34,2630 4676.3,2658.96 4803.96,2658.96 4835,2690 4835,3025 IC3.9@4760,3100
  Top Layer w30: C11.2 4506.46,2561.46 4506.46,2563.65 4565,2622.19 R21.2
  Bottom Layer w30: SW1.1 4220,2390 4264.92,2345.08 4337.75,2345.08 4409.92,2417.25 4409.92,2470.83 4489.09,2550 C11.2
RW_LCD: IC3.37 JP2.6@5715,3265 RN1.4 | length 621.5
  Top Layer w40: IC3.37@5345,3600 RN1.4
  Bottom Layer w30: RN1.4 5515.53,3594.47 5570.53,3594.47 5601.76,3563.24 5601.76,3370.74 5707.5,3265 JP2.6@5715,3265
RXD: C4.1 IC2.12 IC3.10 J2.1 LED2.2 | length 2804.9
  Top Layer w30: v1(3445,2200.29) 3450.29,2195 v1(3585,2195) ; v1(3821.3,2230.98) 3823.21,2229.06 3878.91,2229.06 3880,2227.97 3970.52,2227.97 4020,2277.46 4020,2485 C4.1 4120,2505 LED2.2 J2.1@4300,2505 ; v1(4350,2750) 4578.43,2750 4621.5,2793.06 4621.5,2926.5 4689.47,2994.47 4739.47,2994.47 IC3.10@4745,3000
  Bottom Layer w30: IC2.12 3060,2785 3190,2655 3190,2350 3339.71,2200.29 v1(3445,2200.29) ; v1(3585,2195) 3710,2195 3745,2230 3820.32,2230 v1(3821.3,2230.98) ; J2.1 4315,2715 v1(4350,2750)
TXD: C4.2 IC2.11 IC3.11 J2.2 LED1.2 | length 2647.8
  Top Layer w30: v1(3491.17,2245.29) 3639.71,2245.29 v1(3640,2245) ; C4.2 4080,2440 4135,2385 LED1.2 4195,2390 4296.92,2390 4315,2408.08 J2.2@4315,2410 ; v1(4420,2705) 4422.71,2705 4427.71,2710 4595,2710 4665.35,2780.35 4665.35,2835.35 4730,2900 IC3.11@4745,2900
  Bottom Layer w30: IC2.11 3060,2885 3245,2700 3245,2351.57 3351.28,2245.29 v1(3491.17,2245.29) ; v1(3640,2245) 3790,2395 4030,2395 C4.2 ; J2.2 4369.92,2454.92 4369.92,2654.92 v1(4420,2705)
V_PT100: IC1.6 R6.1 U2.7 | length 1169.5
  Top Layer w40: R6.1 3475,3185 3535,3125 U2.7
  Bottom Layer w40: U2.7 3659.59,3125 3668.83,3115.76 3668.83,3106.17 3720,3055 3980,3055 4101.84,3176.84 4101.84,3339.34 4227.5,3465 IC1.6
VCC: C1.1 C5.2 C6.2 C10.2 C11.1 C15.1 IC1.20 IC2.16 IC3.31 IC3.40 JP3.1 JP3.3 L1.2 R4.1 R9.2 R11.2 R12.2 R13.1 RN1.1 SW1.2 U1.4 U2.11 U4.4 U4.8 VR1.1 VR2.1 | length 11102.3
  Top Layer w30: C15.1 3045,2013.43 3103.86,1954.57 3534.25,1954.57 3587.5,2007.81 3587.5,2015.31 3592.19,2020 C6.2@3600,2020 ; C15.1@3045,2020 3045,2210 C10.2 3042.5,2217.5 3042.5,2382.5 IC2.16 ; C6.2 C6.2@3600,2015 ; U4.8 3695,2749.59 3715,2769.59 v3(3715,2775) ; U4.4 3845,2472.57 3862.57,2455 3935,2455 v1(3940,2460) ; SW1.2@4025,2755 4025,2742.82 4038.34,2729.49 4038.34,2721.66 4082.5,2677.5 4345.04,2677.5 4347.54,2675 4362.81,2675 4405,2632.81 4405,2538.43 C11.1@4493.43,2450 ; R11.2 4379.68,2299.69 4379.68,2336.26 C11.1@4493.43,2450 ; C11.1 C11.1@4493.43,2450
  Top Layer w40: C1.1 2270,3286.57 2279.53,3296.1 2281.1,3296.1 2305,3320 2495,3320 2570,3320 2735,3155 3082.6,3155 ; U1.4@3082.6,3245.79 3082.6,3155 ; R9.2@3335,3537.81 3270,3472.81 3270,3220 3205,3155 3100,3155 3082.6,3155 ; R9.2 3335,3552.5 R4.1 v1(3335,3725) ; C6.2 C5.2 3702.19,2015 3725.94,2038.75 JP3.1@3876.25,2038.75 ; v3(3814.49,2775) 3980.25,2775 3988.55,2766.7 4013.3,2766.7 SW1.2 ; VR2.1 3855,3505 3935,3425 U2.11 3965,3425 4115,3275 R13.1 4115,2855 SW1.2 ; JP3.1 3890,2052.5 3962.5,1980 4017.5,1980 4090,2052.5 JP3.3 4095,2065 v3(4095,2285) ; SW1.2@4025,2755 SW1.2 ; VR1.1@4560,2850.9 VR1.1 ; IC3.40@5345,3900 RN1.1
  Bottom Layer w30: v1(3940,2460) 3965,2485 3965,2704.93 4020,2759.93 SW1.2
  Bottom Layer w40: v1(3335,3725) 3335,3755 3390,3810 3680,3810 3842.73,3972.73 3844.38,3972.73 3855,3983.35 VR2.1 3855,3986.65 3922.72,4054.37 4438.13,4054.37 4527.5,3965 IC1.20 4585,4010 5247.99,4010 5349.04,3908.96 IC3.40@5354.45,3908.96 ; v3(3715,2775) v3(3814.49,2775) ; JP3.1@3885,2040 3890,2045 JP3.1 ; SW1.2 4160,2620 4160,2375 4095,2310 v3(4095,2285) ; C11.1 4504.53,2459.53 4506.1,2459.53 4580,2533.43 4580,2773.64 4560,2793.64 VR1.1 ; IC3.31 5353.51,3008.96 5289.04,3073.43 5289.04,3843.55 IC3.40@5354.45,3908.96 ; IC3.40 IC3.40@5354.45,3908.96
VREF/2: IC1.9 VR1.2 | length 398.4
  Top Layer w40: IC1.9 4252.5,3165 4460,2957.5 VR1.2
VS_LCD: JP2.8@5715,3065 VR2.2 | length 2757.6
  Top Layer w40: VR2.2 3955,3986.65 4022.72,4054.37 5550.63,4054.37 5800,3805 5800,3142.5 5733.93,3076.43 5726.43,3076.43 JP2.8@5715,3065
WR_ADC: IC1.3 IC3.13 | length 1417.1
  Top Layer w20: IC1.3 4303.28,3765 4355,3713.28 v2(4355,3685)
  Bottom Layer w20: v2(4355,3685) 4355,3207.43 4447.43,3115 4573.21,3115 4611.61,3076.61 4611.61,2998.39 4650,2960 4650,2740 4687.57,2702.43 4742.57,2702.43 IC3.13@4745,2700
"XTAL 1": C12.1 IC3.18 Y1.2 | length 408.6
  Top Layer w30: C12.1 4350.69,2230.69 4524.28,2230.69 Y1.2 4533.9,2231.39 4565.29,2200 IC3.18@4745,2200
"XTAL 2": C13.1 IC3.19 Y1.1 | length 442.6
  Top Layer w30: C13.1 4405,1985 4448.48,2028.48 4518.91,2028.48 Y1.1 4590.44,2100 IC3.19@4745,2100
pads on no net: COM1.1 COM1.4 COM1.6 COM1.7 COM1.8 COM1.9 COM1.10 COM1.11 IC2.7 IC2.8 IC2.9 IC2.10 IC3.16 IC3.17 IC3.29 IC3.30 U1.6 U2.8 U2.9 U2.10 U2.12 U2.13 U2.14

## Polygon pours and split planes (outlines as drawn)
no net on Top Layer "NONET_L01_P000" (solid, pour order 0): 2110,4345 2110,1825 5875,1825 5875,4345
no net on Bottom Layer "NONET_L02_P001" (solid, pour order 1): 2110,4345 2110,1825 5875,1825 5875,4340 2115,4340

## Keep-outs
Bottom Layer:
  lines w10: 2110,1825 5875,1825 5875,4340 ; 2110,1830 2110,4330 2110,4345 5875,4345

## Silkscreen, mask and mechanical layers (free items; w line width, h text height)
Top Overlay:
  drawing of 654 lines, arcs and shapes, not listed

## Text inside footprints (layer, text, board x,y; h text height)
C2: Top Overlay "+" at 2960,3997 h22 r180
COM1: Top Overlay "6" at 2572.83,2322.5 h22 r270; Top Overlay "9" at 2572.83,2745.73 h22 r270; Top Overlay "5" at 2946.85,2745.73 h22 r270; Top Overlay "1" at 2946.85,2263.45 h22 r270